# EAGLE board E-P-204-R3.4 (EAGLE 7.7.0)
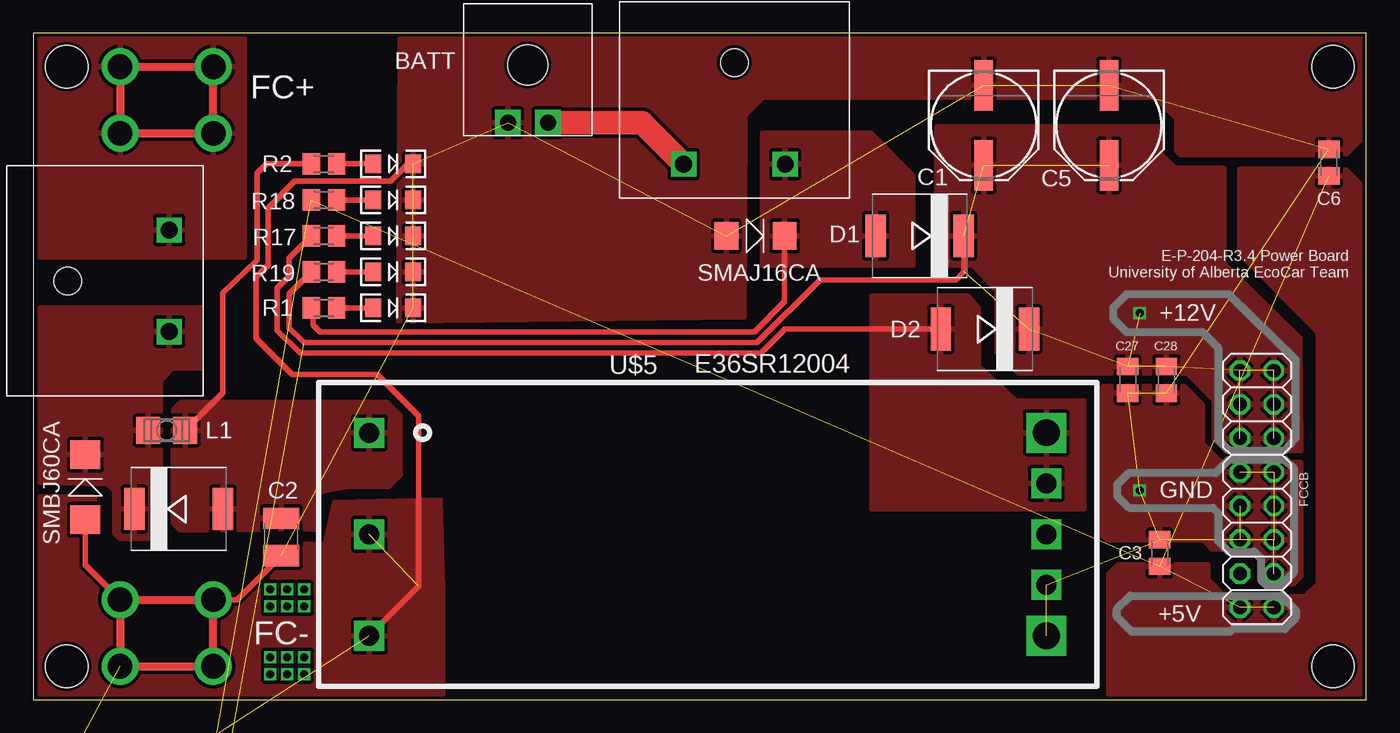
[diagram p0: board, top side]
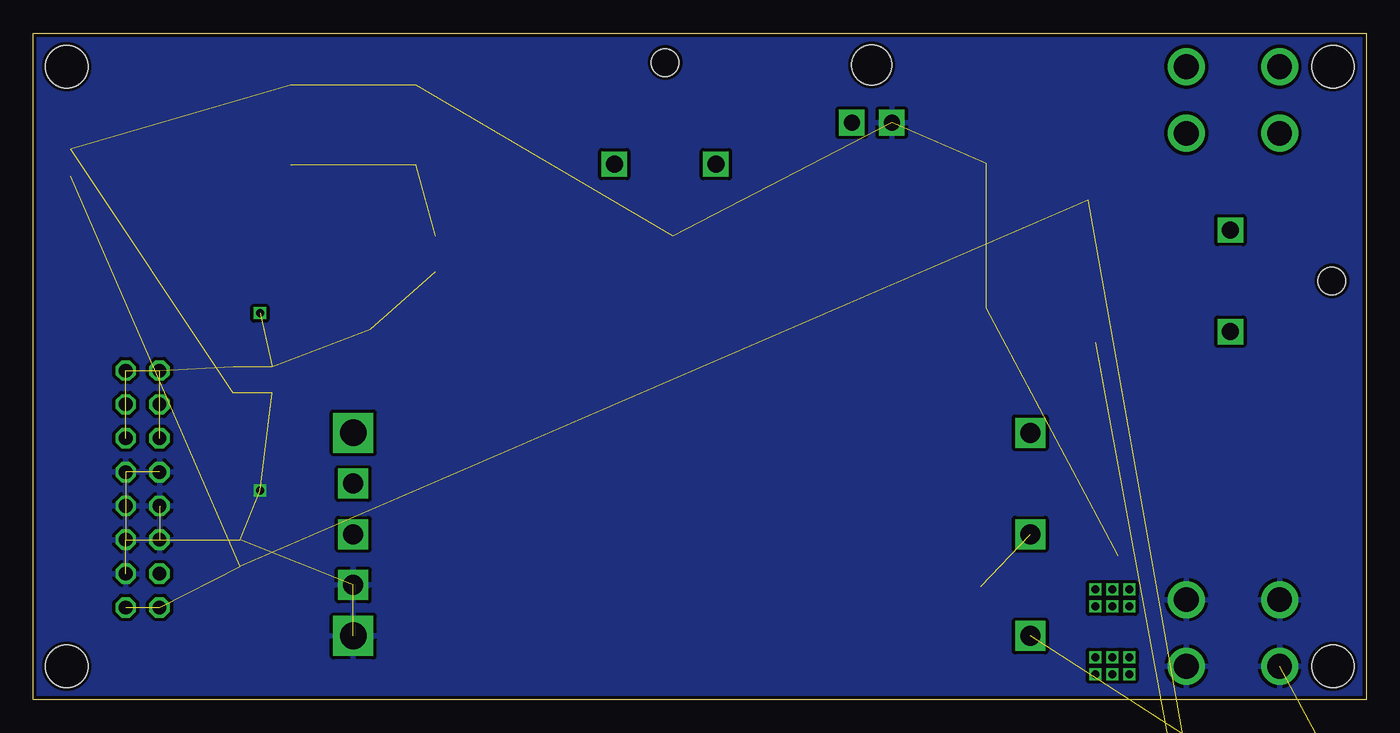
[diagram p1: board, bottom side, seen from below]

Size 100 x 50 mm. Coordinates in mm from the lower left corner, seen from the top.
Outline: 0,0 100,0 100,50 0,50 0,0
Copper layers (1*16): Top 0.035mm / dielectric 1.5mm / Bottom 0.035mm
Design rules "SeeedStudio_2layer_DRU_no_angle_20140221 *": minimum track width 10mil, minimum drill 12mil, track to track 10mil, track to pad 10mil, pad to pad 10mil, via to via 10mil, smd to smd 0mil, copper to edge 10mil, drill to drill 10mil, minimum pad ring 10mil, minimum via ring 6mil, stop-mask expansion 2mil, vias tented up to drill 100mil, thermal gap 10mil
Holes 3.17 mm at 97.5,47.5 2.5,2.5 97.5,2.5 2.5,47.5

## Footprints (pad centres in the part's own frame; a part is rotated, then mirrored left to right if it is on the bottom)
PANASONIC_E = smd 3.8 x 1.4: + 3,0; - -3,0
C1210 = smd 1.6 x 2.7: 1 -1.4,0; 2 1.4,0
C0805K = smd 1.3 x 1.6: 1 -1,0; 2 1,0
DO-214AB_SMC = smd 1.524 x 3.2: A 3.302,0; C -3.302,0
2X08 = drill 1.016 octagon: 1 -8.89,-1.27; 2 -8.89,1.27; 3 -6.35,-1.27; 4 -6.35,1.27; 5 -3.81,-1.27; 6 -3.81,1.27; 7 -1.27,-1.27; 8 -1.27,1.27; 9 1.27,-1.27; 10 1.27,1.27; 11 3.81,-1.27; 12 3.81,1.27; 13 6.35,-1.27; 14 6.35,1.27; 15 8.89,-1.27; 16 8.89,1.27
L3225P = smd 1.8 x 2: 1 -1.4,0; 2 1.4,0
LED-1206 = smd 1.2 x 1.4: A -1.5,0; C 1.5,0
M0805 = smd 1.3 x 1.6: 1 -0.95,0; 2 0.95,0
STM_SMC = smd 1.54 x 3.14: A 3.325,0; C -3.325,0
.277X.089 = smd 2.159 x 2.261: ANODE 0,0; CATHODE 4.877,0
.25X.07 = smd 1.778 x 2.083: ANODE 0,0; CATHODE 4.369,0
2.30X0.90X0.34 = drill 1.5 square: P$1 -25.4,7.62; P$2 -25.4,0; P$3 -25.4,-7.62; P$5 25.4,-3.81; P$6 25.4,0; P$7 25.4,3.81 | drill 2 square: P$4 25.4,-7.62; P$8 25.4,7.62
SCREW-8191 = drill 1.85: P$1 0,0; P$2 0,5; P$3 7,5; P$4 7,0
MINI-BLADE-FUSE = drill 1.27 square: IN 3.81,7.62; OUT -3.81,7.62 | hole 2.083: 0,0
MBR360GOS = drill 1.5: P$1 0,0; P$2 25,0
43650-0200 = drill 1.2 pad 1.93 square: P$1 -1.5,0; P$2 1.5,0 | hole 3: 0,-4.32
D2PAK-5 = smd 3.048 x 1.016: 1 6.096,-3.404; 2 6.096,-1.702; 4 6.096,1.702; 5 6.096,3.404 | smd 7.62 x 1.016: 3 3.81,0 | smd 8.382 x 10.668: GROUND -4.191,0
ESK107M025AC3AA = drill 0.8: P$1 0,0; P$2 2.5,0
ESK108M025AH4EA = drill 0.9: P$1 0,0; P$2 5,0
M1418-ND = drill 1.27: P$1 0,0; P$2 19.812,0

## Placement (x,y rotation side)
C1  330u  [PANASONIC_E]  71.3,43.1 270 top
C2  2.2u  [C1210]  18.6,12.2 270 top
C3  3.3uF  [C0805K]  84.5,11 90 top
C5  330u  [PANASONIC_E]  80.7,43.1 270 top
C6  3.3uF  [C0805K]  97.2,40.3 90 top
C27  3.3uF  [C0805K]  82.1,24 270 top
C28  3.3uF  [C0805K]  85,24 270 top
D1  VISHAY_SL43  [DO-214AB_SMC]  66.5,34.8 180 top
D2  VISHAY_SL43  [DO-214AB_SMC]  71.4,27.8 180 top
FCCB  [2X08]  91.8,15.8 270 top
L1  270n  [L3225P]  10,20.2 0 top
L2  270n  [L3225P]  -4.45,-15.24 0 top  (outside the outline)
LED1  [LED-1206]  27,29.4 0 top
LED2  [LED-1206]  27,40.2 0 top
LED4  [LED-1206]  27,34.8 0 top
LED5  [LED-1206]  27,37.5 0 top
LED6  [LED-1206]  27,32.1 0 top
R1  500  [M0805]  21.8,29.4 180 top
R2  2k  [M0805]  21.8,40.2 180 top
R17  500  [M0805]  21.8,34.8 180 top
R18  150  [M0805]  21.8,37.5 180 top
R19  500  [M0805]  21.8,32.1 180 top
U$2  STPS5L60  [STM_SMC]  10.9,14.3 0 top
U$3  SMBJ60CA  [.277X.089]  3.9,13.5 90 top
U$4  SMAJ16CA  [.25X.07]  52,34.8 0 top
U$5  E36SR12004  [2.30X0.90X0.34]  50.6,12.4 0 top
U$6  SCREW-8191  [SCREW-8191]  13.5,7.5 180 top
U$7  FUSEMINI-BLADE  [MINI-BLADE-FUSE]  2.57,31.42 270 top
U$8  SCREW-8191  [SCREW-8191]  13.5,47.5 180 top
U$9  MBR360GOS  [MBR360GOS]  4.45,-90.17 0 top  (outside the outline)
U$10  FUSEMINI-BLADE  [MINI-BLADE-FUSE]  52.6,47.8 180 top
U$12  43650-0200  [43650-0200]  37.1,43.3 180 top
U$14  LM2576  [D2PAK-5]  1.91,-36.83 0 top  (outside the outline)
U$15  CAPESK107M025AC3AA  [ESK107M025AC3AA]  41.91,-108.58 0 top  (outside the outline)
U$16  CAPESK108M025AH4EA  [ESK108M025AH4EA]  22.86,-108.58 0 top  (outside the outline)
U$17  M1418-ND  [M1418-ND]  2.54,-66.67 0 top  (outside the outline)

## Library data of the parts
C1 C5 = SparkFun-Capacitors
C2 C3 C6 C27 C28 L1 L2 = resistor
D1 D2 U$2-U$5 = Power Board Components
FCCB = pinhead
LED1 LED2 LED4-LED6 = SparkFun
R1 R2 R17-R19 = rcl
U$6-U$10 U$12 = Shell2013
U$14-U$17 = Shell2015

## Nets
5V_OUT: C3.1 C6.1 FCCB.15 FCCB.16 R18.2 U$14.4 U$16.P$1
12V_OUT: C1.+ C5.+ C27.1 C28.1 D1.C D2.C FCCB.1 FCCB.2 FCCB.3 FCCB.4 FCCB.5 FCCB.6 R19.2 U$14.1 U$15.P$1
BATT_12V: D1.A R1.2 U$4.CATHODE U$10.OUT
BATT_IN: U$10.IN U$12.P$1
FC_12V: D2.A R17.2 U$5.P$7 U$5.P$8
FC_48V: C2.1 L1.2 R2.2 U$2.A U$5.P$1
FC_FUSED: L1.1 U$2.C U$3.CATHODE U$7.IN
FC_GND: L2.1 U$5.P$2 U$5.P$3
FC_IN: U$7.OUT U$8.P$1 U$8.P$2 U$8.P$3 U$8.P$4
FC_PWR_GOOD: FCCB.13
GND: C1.- C2.2 C3.2 C5.- C6.2 C27.2 C28.2 FCCB.7 FCCB.8 FCCB.9 FCCB.10 FCCB.11 FCCB.12 FCCB.14 L2.2 LED1.C LED2.C LED4.C LED5.C LED6.C U$3.ANODE U$4.ANODE U$5.P$4 U$5.P$5 U$6.P$1 U$6.P$2 U$6.P$3 U$6.P$4 U$9.P$2 U$12.P$2 U$14.3 U$14.5 U$14.GROUND U$15.P$2 U$16.P$2
N$3: LED1.A R1.1
N$4: LED2.A R2.1
N$16: U$9.P$1 U$14.2 U$17.P$2
N$21: LED4.A R17.1
N$22: LED5.A R18.1
N$24: LED6.A R19.1

## Tracks (layer width: path | path; a pad name or v marks a point on that pad's centre or on a via)
5V_OUT  (6 unrouted)
  pour Top: 90.5,39.8 90.5,33.5 96.4,27.6 96.4,8.7 95.4,7.7 89.4,7.7 88.1,9 88.1,10.1 81.4,10.1 80.7,9.4 80.7,0.4 99.6,0.4 99.6,38.6 98.4,39.8
12V_OUT  (via drill 0.6)  (14 unrouted)
  Top 0.406: D1.C 69.8,32.1 69.2,31.5 59,31.5 54.3,26.8 20.3,26.8 19.2,27.9 19.2,30.45 R19.2
  other vias: 83,29
  pour Top: 67.8,32.6 70.5,32.6 72.3,30.7 72.3,26.1 73.9,24.5 86.6,24.5 88.6,22.5 88.6,19.6 89.5,18.7 95.1,18.7 95,27.1 89.3,32.7 89.3,39.9 85.6,39.9 84.6,40.9 84.6,43 67.8,43
BATT_12V
  Top 0.406: U$4.CATHODE 56.37,29.87 54.1,27.6 21.5,27.6 21,28.1 21,29.25 R1.2
  pour Top: 54.7,42.5 54.7,32.6 66,32.6 66,39.3 62.8,42.5
BATT_IN
  Top 1.778: U$12.P$1 45.67,43.3 U$10.IN
FC_12V
  Top 0.406: D2.A 56.4,27.8 54.6,26 20,26 18.3,27.7 18.3,30.9 19.2,31.8 19.2,33.15 R17.2
  pour Top: 78.8,14.3 62.9,14.3 62.9,30.3 70.1,30.3 70.9,29.4 70.9,25 73.7,22.4 78.8,22.4
FC_48V
  Top 0.406: R2.2 17.5,40.2 16.8,39.5 16.8,33 14.2,30.5 14.2,23 L1.2
  pour Top: 10.5,21.7 10.5,13.3 11.1,12.7 21.3,12.8 21.3,15.6 23.6,16 26.6,16 27.5,16.9 27.5,21.3 26.5,22.3 11.1,22.3
FC_FUSED
  pour Top: 12.6,29.4 0.5,29.4 0.5,16.3 5.6,16.2 6.1,15.7 6.1,12.5 6.5,12.1 9.1,12.1 9.5,12.5 9.5,23.9 10.4,24.9 12.6,24.9
FC_GND  (2 unrouted)
  Top 0.406: 28.1,40.2 26.8,38.9 19.6,38.9 17.6,36.9 17.6,32.6 16.7,31.7 16.7,27.1 19.4,24.4 25.8,24.4 28.9,21.3 28.9,8.48 U$5.P$3
  pour Top: 0.5,15.2 4.5,15.2 5.2,14.4 5.2,12 6.9,10.3 13.9,10.3 15.3,11.7 20.4,11.7 21.9,11.6 22.6,14.8 30.5,15 30.7,8.4 30.7,0.4 0.5,0.4
FC_IN
  pour Top: 0.5,49.6 15.8,49.6 15.8,33.2 0.5,33.2
GND  (via drill 0.6)  (30 unrouted)
  Top 0.406: U$3.ANODE 3.9,10.1 U$6.P$4 | U$6.P$1 15.3,7.5 C2.2
  other vias: 83,15.7
  pour Bottom (rank 2): 99.6,0.4 99.6,49.6 0.5,49.6 0.5,0.4
  pour Top: 53.3,28.7 53.4,43.9 54.7,45.2 84.2,45.2 85.8,43.6 85.8,41.2 86.1,40.9 98.4,40.9 99.6,42.1 99.6,49.6 27.5,49.6 27.4,28.4
  pour Top: 95.1,17.8 89.1,17.8 87.7,19.2 87.7,22.1 86.3,23.5 80.3,23.5 79.9,23.1 79.9,12.6 80.6,12 87.8,12 88.4,11.3 91.3,11.3 92,10.6 92.1,9.2 92.5,8.7 94.5,8.7 95.1,9.3
N$1  (via drill 0.6)
  other vias: 17.78,1.91
N$2  (via drill 0.6)
  other vias: 17.78,3.17
N$3
  Top 0.406: R1.1 LED1.A
N$4
  Top 0.406: R2.1 LED2.A
N$5  (via drill 0.6)
  other vias: 19.05,3.17
N$6  (via drill 0.6)
  other vias: 19.05,1.91
N$7  (via drill 0.6)
  other vias: 20.32,1.91
N$8  (via drill 0.6)
  other vias: 20.32,3.17
N$9  (via drill 0.6)
  other vias: 17.78,6.99
N$10  (via drill 0.6)
  other vias: 19.05,6.99
N$12  (via drill 0.6)
  other vias: 20.32,6.99
N$13  (via drill 0.6)
  other vias: 20.32,8.26
N$14  (via drill 0.6)
  other vias: 19.05,8.26
N$15  (via drill 0.6)
  other vias: 17.78,8.26
N$16  (2 unrouted)
N$21
  Top 0.406: R17.1 LED4.A
N$22
  Top 0.406: R18.1 LED5.A
N$24
  Top 0.406: R19.1 LED6.A

## Text on the board
tPlace: BATT | FC+ | E-P-204-R3.4 Power Board / University of Alberta EcoCar Team | +12V | GND | FC- | +5V
tDocu: FC_48V | 5V_OUT | FC_12V | 12V_OUT | BATT_12V